# Altium PCB 100862.pcbdoc (part 3 of 3)
Units mm, origin at the board's own origin, x right, y up, seen from the top; angles counter-clockwise.
Board outline 48 x 50 mm, 4 copper layers (Top Layer, Internal Ground, Internal Power, Bottom Layer), stack 1.481 mm thick; 185 components, 111 nets, 536 pads, 346 vias.
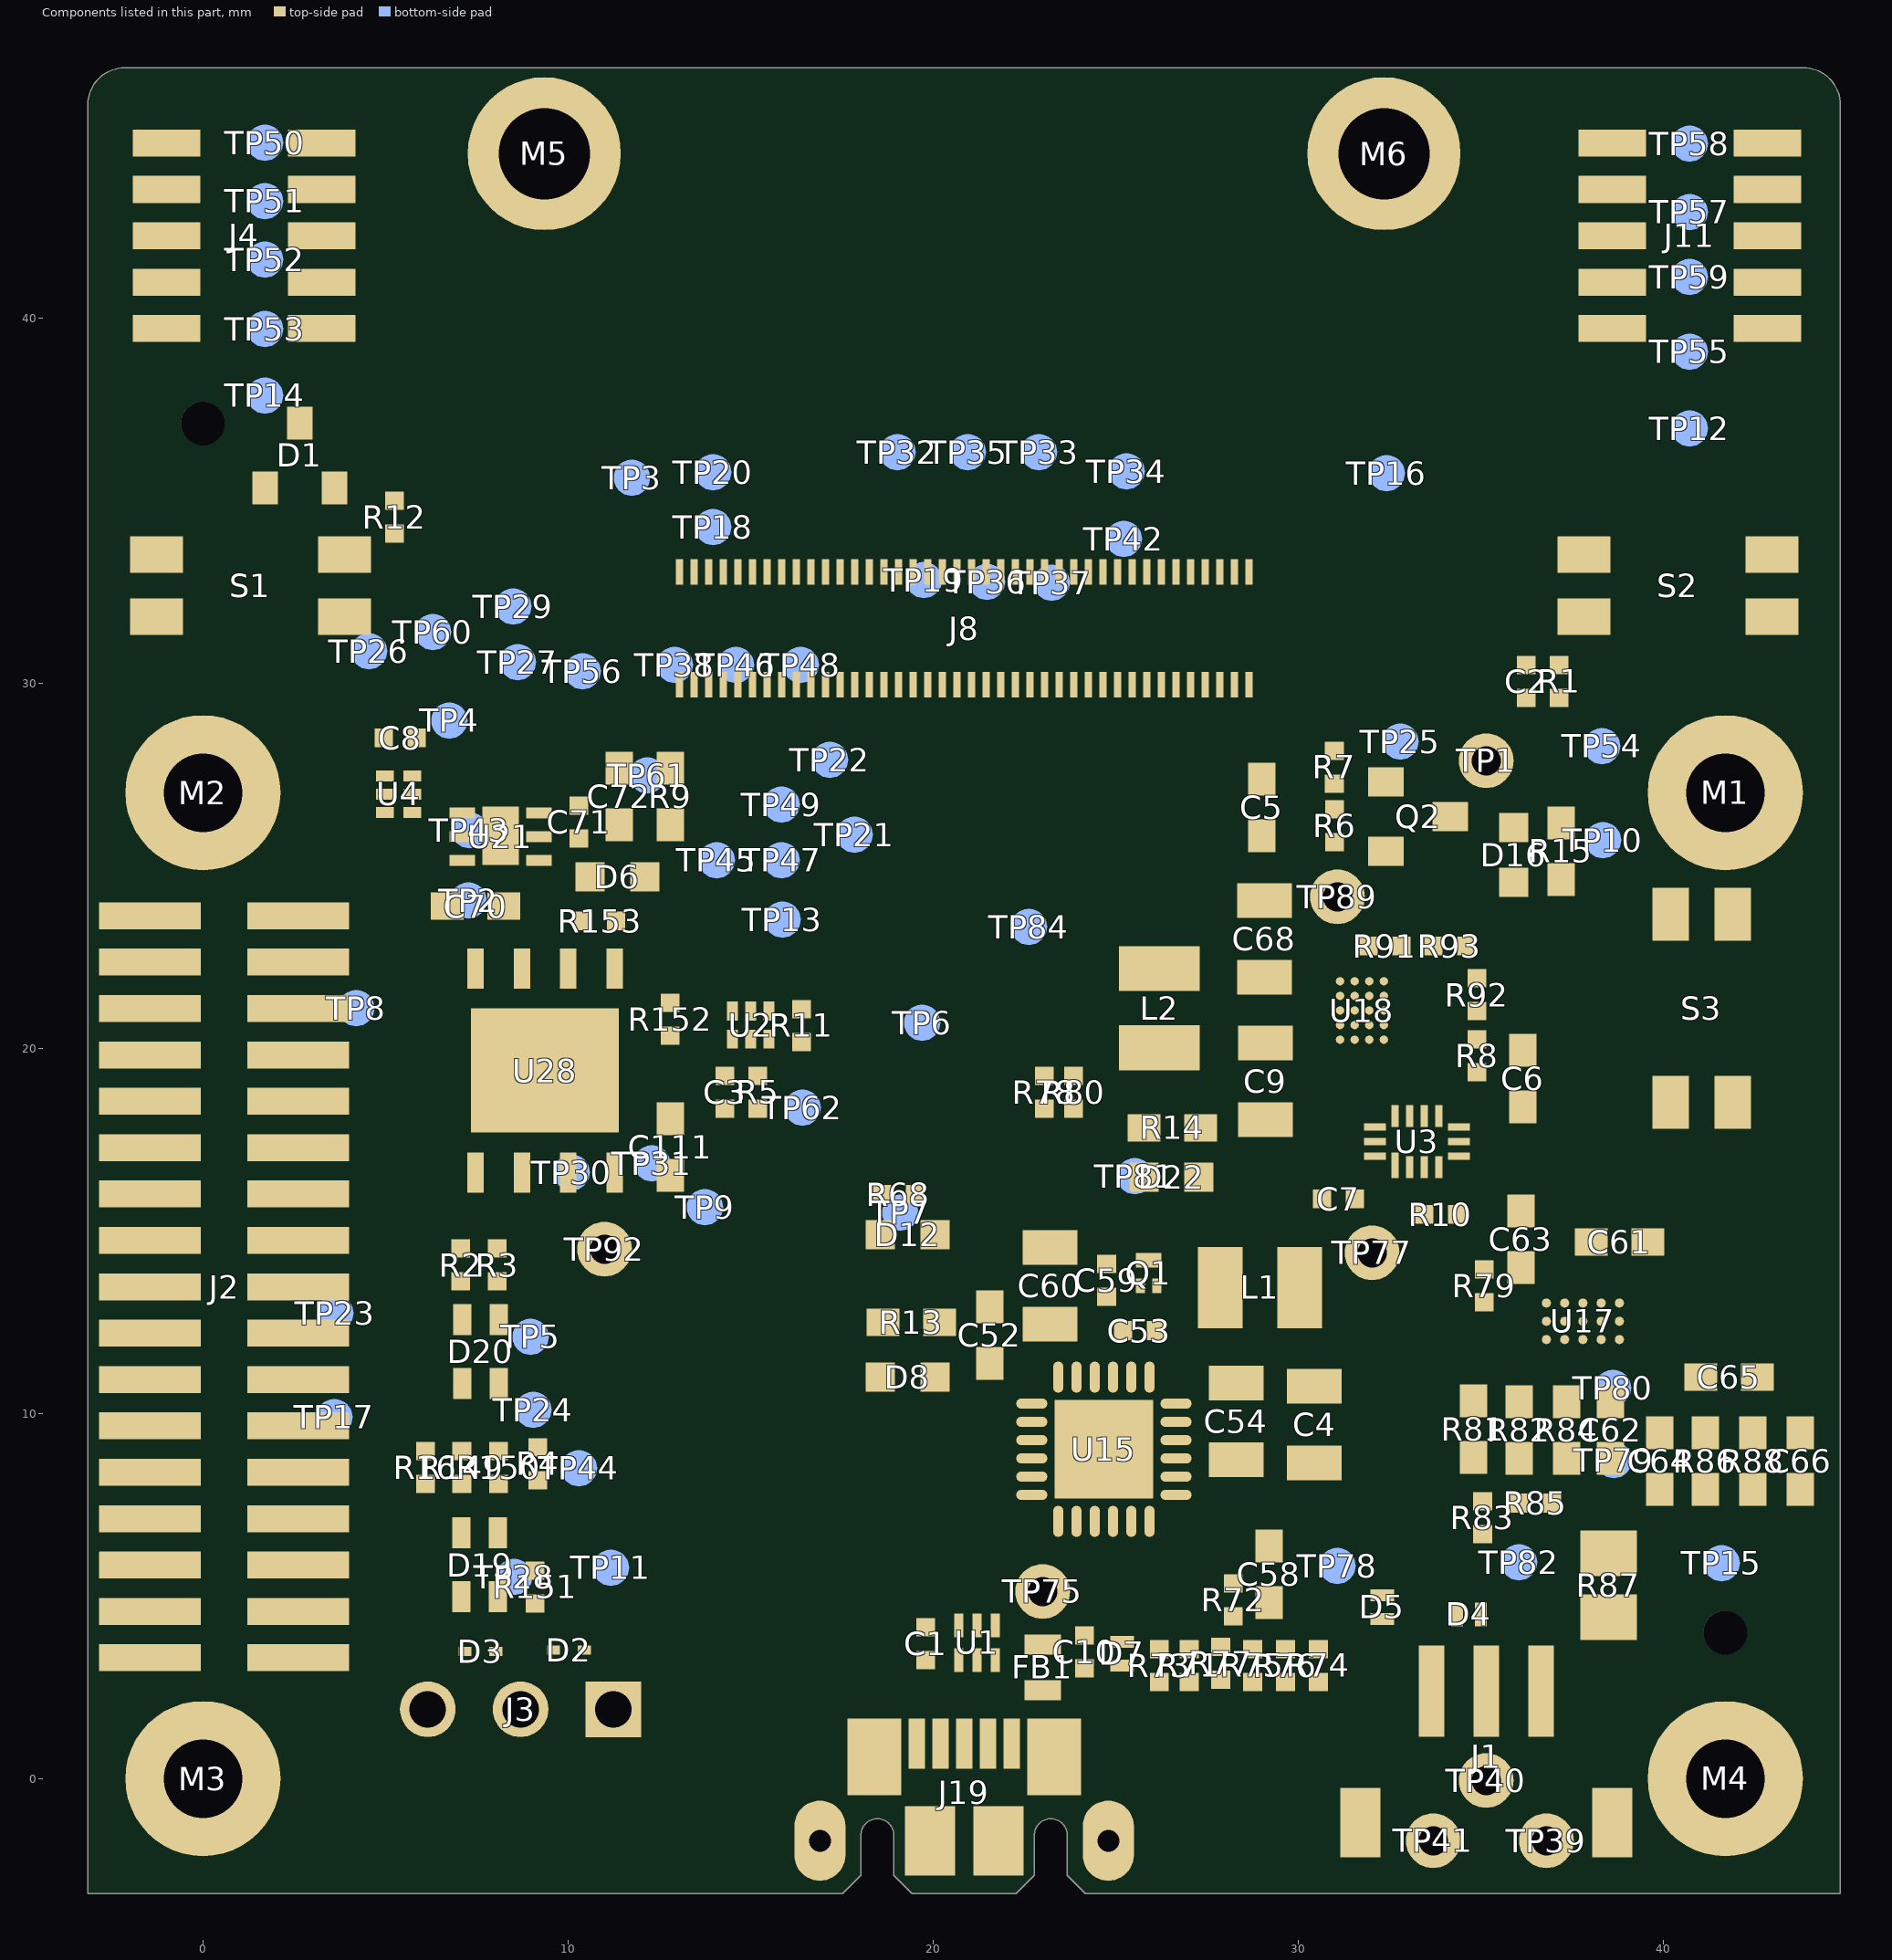
[diagram p5: the components of this part, seen from the top]

## Silkscreen, mask and mechanical layers (free items; w line width, h text height)
Top Overlay:
  rectangle: 11.15,4.1 15.15,8.1
  lines w0.1: 31.55,11.625 31.55,11.2 32.5,11.2 ; 32.975,10.75 32.975,11.2 ; 33.8,10.775 33.8,11.15 ; 33.85,11.2 34.3,11.2 ; 34.8,11 34.8,11.2 ; 36.1,11 36.1,11.2 ; 37.4,11 37.4,11.2 ; 38.6,11 38.6,11.2 36.1,11.2 ; 32.5,11.2 32.5,11.6 32.5,11.2 ; 32.5,11.2 34.3,11.2 ; 34.3,11.2 34.8,11.2 ; 34.8,11.2 36.1,11.2 ; 12.875,30.725 28.725,30.725 28.725,32.225 12.875,32.225 12.875,30.725
  lines w0.127: 26.554,12.648 26.754,12.848 26.754,14.648 26.954,14.848
  text "RADIO DBG" at 4.7,45.2 h0.7 r270
  text "MCU DBG" at 38.4,37.1 h0.7
  text "RESET" at -0.3,29.7 h0.7
  text "ISP" at 39.8,29.7 h0.7
  text "3V6" at 36.225,27.525 h0.7
  text "FPGA" at 14.4,24.5 h0.6
  text "POWER" at 38.125,22.6 h0.7 r270
  text "CHG" at 28.075,16.125 h0.6
  text "STAT" at 17.925,13.5 h0.7
  text "RADIO" at 5.85,13.475 h0.7 r270
  text "3V3_APP" at 9.125,12.025 h0.6
  text "REV" at 14.2,10.4 h0.8 r270
  text "VBUS" at 17.975,9.65 h0.7
  text "APPLICATION" at 16.9,9.275 h0.8 r270
  text "'.Board_Number'" at 18.275,9.275 h0.8 r270
  text "BOARD" at 15.55,7.925 h0.8 r270
  text "MCU" at 5.675,6.575 h0.7 r270
  text "EVM" at 18.225,4.65 h0.8 r270
  text "TEMP" at 36.175,4.113 h0.7 r90
  text "-" at 39.35,-2.85 h0.7
  text "+" at 30.275,-2.95 h0.7
  text ".Layer_Name" at -25.005,-126.749 h3.5
Bottom Overlay:
  text "TEMP" at 35.95,3.4 h0.6 r90
  text "-" at 38.4,-2.075 h0.7 r90
  text "+" at 32.025,-2.125 h0.7
  text ".Layer_Name" at -29.605,-126.749 h3.5
Top Paste:
  text ".Layer_Name" at -25.348,-126.08 h3.5
Bottom Paste:
  text ".Layer_Name" at -29.838,-126.663 h3.5
Top Solder:
  text ".Layer_Name" at -26.022,-126.08 h3.5
Bottom Solder:
  text ".Layer_Name" at -30.513,-126.663 h3.5
Drill Guide:
  text ".Layer_Name" at -24.798,-126.747 h3.5
Outline:
  lines w0.013: -3.15,-3.15 17.525,-3.15 18.025,-2.65 18.025,-1.55 cw(c18.475,-1.55) 18.925,-1.55 18.925,-2.65 19.425,-3.15 22.275,-3.15 22.775,-2.65 22.775,-1.55 cw(c23.225,-1.55) 23.675,-1.55 23.675,-2.65 24.175,-3.15 44.85,-3.15 44.85,45.85 ccw(c43.85,45.85) 43.85,46.85 -2.15,46.85 ccw(c-2.15,45.85) -3.15,45.85 -3.15,-3.15 ; 16.6,-2.05 ccw(c16.9,-2.05) 17.2,-2.05 17.2,-1.35 ccw(c16.9,-1.35) 16.6,-1.35 16.6,-2.05 ; 24.5,-2.05 ccw(c24.8,-2.05) 25.1,-2.05 25.1,-1.35 ccw(c24.8,-1.35) 24.5,-1.35 24.5,-2.05
FAB_DWG:
  drawing of 259 lines, arcs and shapes, not listed
  text "1" at 340.127,323.546 h7.62
  text "6" at -211.205,323.368 h7.62
  text "5" at -100.613,323.292 h7.62
  text "7" at -321.136,323.241 h7.62
  text "4" at 8.988,323.14 h7.62
  text "3" at 119.757,323.14 h7.62
  text "2" at 229.79,323.14 h7.62
  text "REVISIONS" at 294.147,314.558 h2.54
  text "NOTES: UNLESS OTHERWISE SPECIFIED" at -362.313,308.096 h2.03
  text "REV" at 211.855,307.558 h2.03
  text "DESCRIPTION" at 266.359,307.558 h2.03
  text "DATE" at 358.043,307.558 h2.03
  text "APRVD" at 383.231,307.558 h2.03
  text "1   DIMENSIONS AND VALUES ARE METRIC." at -362.313,300.096 h2.03
  text "01" at 212.259,299.558 h2.54
  text "INITIAL RELEASE" at 223.291,299.558 h2.54
  text "07/19/2016" at 352.131,299.558 h2.54
  text "REF" at -159.555,296.932 h2.29
  text "TRACE" at -108.387,296.932 h2.29
  text "LAYER" at -200.387,294.932 h2.29
  text "IMPEDANCE" at -182.051,294.932 h2.29
  text "TYPE" at -134.471,294.932 h2.29
  text "2   FABRICATION OF PRINTED CIRCUIT BOARD SHALL BE IN ACCORDANCE WITH" at -362.313,294.096 h2.03
  text "LYR" at -159.555,292.932 h2.29
  text "WIDTH" at -108.387,292.932 h2.29
  text "02" at 211.634,292.558 h2.54
  text "TVS DIODE AND PULL-UP CHANGES" at 222.666,292.558 h2.54
  text "08/12/2016" at 351.506,292.558 h2.54
  text "IPC-6011 AND IPC-6012, CLASS 2, AND THE DESIGN INTENT OF IPC-2221 AND" at -362.313,290.096 h2.03
  text "LAYER 1" at -202.419,286.932 h2.29
  text "90 OHM" at -182.007,286.932 h2.29
  text "DIFF PAIR" at -150.007,286.932 h2.29
  text "0.213" at -108.587,286.932 h2.29
  text "2" at -158.075,286.78 h2.29
  text "IPC-2222,CLASS 2, AND SHALL MEET THE ACCEPTABILITY REQUIREMENTS OF" at -362.313,286.096 h2.03
  text "03" at 211.634,286.083 h2.54
  text "DESIGN VALIDATION" at 222.666,286.083 h2.54
  text "09/27/2016" at 351.506,286.083 h2.54
  text "IPC-A-600. PRODUCE PCB USING GERBER OR ODB++ FILES PROVIDED." at -362.313,282.096 h2.03
  text "3   FABRICATION VENDOR MUST BE UL APPROVED AND BOARD SHALL BE MARKED WITH" at -362.313,276.096 h2.03
  text "A UL REGISTERED LOGO. MATERIAL MUST MEET UL 94V-0 FLAMMABILITY RATING." at -362.313,272.096 h2.03
  text "4   MATERIAL REQUIREMENTS: MANUFACTURER SHALL SELECT MATERIALS TO ACHIEVE A" at -362.313,266.096 h2.03
  text "IMPEDANCE CONTROL CHART" at -197.543,265.932 h5.08
  text "BALANCED CONSTRUCTION WITH THE OPTION OF MODIFYING DIELECTRIC THICKNESS" at -362.313,262.096 h2.03
  text "TO MEET THE REQUIREMENTS SPECIFIED HEREIN." at -362.313,258.096 h2.03
  text "15" at -153.431,256.932 h2.03
  text "D" at 401.976,253.874 h7.62
  text "D" at -382.706,253.722 h7.62
  text "5  BASE MATERIALS: GLASS EPOXY FR4 OR EQUIVALENT PER IPC-4101 MEETING RoHS" at -362.313,252.096 h2.03
  text "REQUIREMENTS FOR PCB FABRICATION AND ASSEMBLY, NOT LESS THAN TG150," at -362.313,248.096 h2.03
  text "A  SEE LAYER DETAIL FOR LAYER STACK UP, ESTIMATED DIELECTRIC THICKNESS," at -362.313,244.096 h2.03
  text "AND COPPER WEIGHT." at -362.313,240.096 h2.03
  text "B  MANUFACTURER SHALL SUBMIT A PROPOSED STACK UP FOR SYNAPSE APPROVAL" at -362.313,236.096 h2.03
  text "IF MODIFICATION IS REQUIRED." at -362.313,232.096 h2.03
  text "C  NO MATERIAL SUBSTITUTIONS WILL BE ALLOWED WITHOUT SYNAPSE APPROVAL." at -362.313,228.096 h2.03
  text "6   PROCESSING ALLOWANCE:" at -362.313,222.096 h2.03
  text "A  LAYER REGISTRATION FROM PRIMARY SIDE TO SECONDARY SIDE SHALL NOT" at -362.313,218.096 h2.03
  text "EXCEED 0.13mm TOTAL." at -362.313,214.096 h2.03
  text "B  MAXIMUM BOW AND TWIST SHALL BE .75% PER IPC-TM-650." at -362.313,210.096 h2.03
  text "7   VIAS" at -362.313,204.096 h2.03
  text "A  VIAS WITH A FINISHED HOLE SIZE OF 0.25mm OR SMALLER DO NOT REQUIRE" at -362.313,200.096 h2.03
  text "A MINIMUM HOLE SIZE AND MAY BE PLATED SHUT OR FILLED WITH SOLDER" at -362.313,196.096 h2.03
  text "MASK. MINIMUM SOLDER PLATING MUST BE MAINTAINED." at -362.313,192.096 h2.03
  text "B  ALL LASER VIA IN PADS TO BE COPLANAR IF PRESENT IN DESIGN." at -362.313,188.096 h2.03
  text "8   CONDUCTORS:  COPPER FOIL SHALL BE IN ACCORDANCE WITH IPC-4562/0." at -362.313,182.096 h2.03
  text "A  FINISH. COPPER PLATE THICKNESS ON SURFACE COPPER AND PLATED" at -362.313,178.096 h2.03
  text "THROUGH HOLES TO BE 0.025mm MINIMUM." at -362.313,174.096 h2.03
  text "B  MINIMUM FINISH CONDUCTOR WIDTH IS 0.076mm" at -362.313,170.096 h2.03
  text "C  MINIMUM FINISHED CONDUCTOR SPACING (AIR GAP) INCLUDING PADS, VIAS," at -362.313,166.096 h2.03
  text "SHAPES, ETC. IS 0.076mm." at -362.313,162.096 h2.03
  text "9   FINAL FINISH SHALL BE ELECTROLESS NICKEL / IMMERSION GOLD (ENIG)." at -362.313,156.096 h2.03
  text "FINISH THICKNESS SHALL BE 3 TO 6 um [118 TO 236 MICROINCHES] OF NICKEL" at -362.313,152.096 h2.03
  text "AND 0.04 TO 0.125um [1.5 TO 5 MICROINCHES] OF GOLD." at -362.313,148.096 h2.03
  text "FINISH SHALL BE RoHS COMPLIANT AND MEET REQUIREMENTS OF IPC-4552." at -362.313,144.096 h2.03
  text "10  FILLETING IS NOT PERMITTED WITHOUT PRIOR SYNAPSE APPROVAL." at -362.313,138.096 h2.03
  text "11  SOLDER MASK AND COATING:  APPLY SOLDER MASK TO PRIMARY AND SECONDARY" at -362.313,132.096 h2.03
  text "C" at 401.976,128.423 h7.62
  text "C" at -382.833,128.22 h7.62
  text "SIDES OF PRINTED WIRING BOARD USING SUPPLIED GERBER FILES IN ACCORDANCE" at -362.313,128.096 h2.03
  text "WITH IPC-SM-840, THICKNESS BETWEEN 0.02 - 0.04mm, COLOR GREEN LIQUID" at -362.313,124.096 h2.03
  text "PHOTO-IMAGEABLE, CLASS 2." at -362.313,120.096 h2.03
  text "12  OVERALL BOARD THICKNESS SHALL BE MEASURED OVER FINAL FINISH INCLUDING" at -362.313,114.096 h2.03
  text "SOLDER MASK." at -362.313,110.096 h2.03
  text "13  SILKSCREEN:  APPLY SILKSCREEN (LEGEND) TO PRIMARY AND SECONDARY SIDES" at -362.313,104.096 h2.03
  text "OF PRINTED CIRCUIT BOARD. USE PERMANENT INK, NON-NUTRIENT, NON-" at -362.313,100.096 h2.03
  text "CONDUCTIVE POLYMER, COLOR WHITE, PER IPC-4781, TYPE 2. RELIEVE LEGEND" at -362.313,96.096 h2.03
  text "FROM ALL EXPOSED LANDS AND HOLES AS REQUIRED." at -362.313,92.096 h2.03
  text "14  ANY ALTERATIONS TO THE PROVIDED GERBER ARTWORK FILES MUST BE SUBMITTED" at -362.313,86.096 h2.03
  text "TO SYNAPSE FOR APPROVAL." at -362.313,82.096 h2.03
  text "15  IMPEDANCE REQUIREMENTS: LAYERS AND SIGNALS WITH CONTROLLED IMPEDANCES" at -362.313,76.096 h2.03
  text "ARE DETAILED IN THE CONTROLLED IMPEDANCE CHART. MANUFACTURER HAS THE" at -362.313,72.096 h2.03
  text "OPTION OF ADJUSTING THE DIELECTRIC THICKNESS AND TRACE WIDTHS AS" at -354.563,67.846 h2.03
  text "REQUIRED TO MEET THE SPECIFICATIONS CONTAINED IN THIS DRAWING." at -354.563,63.846 h2.03
  text "A  IMPEDANCE TOLERANCES ARE +/-10%." at -362.063,58.846 h2.03
  text "B  ANY ADJUSTMENTS TO DIELECTRIC THICKNESS OR TRACE WIDTHS MUST BE" at -362.063,54.096 h2.03
  text "APPROVED BY SYNAPSE." at -362.313,50.346 h2.03
  text "C  IMPEDANCE TEST RESULTS AND TEST COUPONS FROM EACH LOT SHALL BE" at -366.063,45.846 h2.03
  text "PROVIDED TO SYNAPSE." at -366.063,42.096 h2.03
  text "16  MARK MANUFACTURER NAME, INITIALS, OR LOGO, LOT NUMBER, DATE CODE," at -362.313,36.596 h2.03
  text "UL RECOGNITION MARK AND FLAME RATING IN ETCH OR SILKSCREEN." at -362.313,32.596 h2.03
  text "17  PANELIZATION: COORDINATE WITH SYNAPSE OR THE SYNAPSE SPECIFIED" at -362.313,26.846 h2.03
  text "ASSEMBLY VENDOR FOR PANEL SIZE AND CONFIGURATION. IF BOARDS ARE" at -362.313,22.846 h2.03
  text "NOT TO BE COMPLETELY ROUTED OUT, TRIM PANELIZATION TABS TO LESS" at -362.313,18.846 h2.03
  text "THAN 0.1mm UPON DE-PANELIZATION. AVOID PANELIZATION TABS IN AREAS" at -362.313,14.846 h2.03
  text "INDICATED ON THIS DRAWING." at -362.313,10.846 h2.03
  text "18  BOARD MUST BE ELECTRICALLY TESTED USING SUPPLIED IPC-356 NETLIST." at -361.813,5.846 h2.03
  text "B" at -382.604,2.82 h7.62
  text "B" at 405.053,0.524 h7.62
  text "PRIMARY SIDE" at -285.239,-10.029 h2.03
  text "SILKSCREEN" at -255.995,-15.029 h2.03
  text "SOLDERMASK" at -255.995,-20.529 h2.03
  text "1/4 OZ CU" at -309.63,-27.449 h2.03
  text "LAYER 1 (SIGNAL)" at -255.995,-27.529 h2.03
  text "DIELECTRIC" at -311.235,-33.029 h2.03
  text "1.50 +/-0.15" at -356.239,-39.529 h2.03
  text "1/2 OZ CU" at -309.73,-40.649 h2.03
  text "LAYER 2 (GROUND)" at -255.995,-41.029 h2.03
  text "FINISHED" at -352.991,-44.529 h2.03
  text "DIELECTRIC" at -311.235,-45.029 h2.03
  text "THICKNESS" at -354.303,-49.529 h2.03
  text "LAYER 3 (POWER)" at -255.995,-49.529 h2.03
  text "1/2 OZ CU" at -309.73,-49.649 h2.03
  text "DIELECTRIC" at -311.235,-57.529 h2.03
  text "1/4 OZ CU" at -309.63,-62.749 h2.03
  text "LAYER 4 (SIGNAL)" at -255.995,-63.029 h2.03
  text "SOLDERMASK" at -255.995,-70.029 h2.03
  text "SILKSCREEN" at -255.995,-76.029 h2.03
  text "SECONDARY SIDE" at -286.863,-80.529 h2.03
  text "DIMENSIONS ARE FOR REFERENCE ONLY," at -21.109,-85.472 h2.29
  text "USE BOARD OUTLINE FOR DIMENSIONAL DATA." at -27.169,-90.062 h2.29
  text "LAYER DETAIL" at -299.879,-93.524 h5.08
  text "SCALE:NONE" at -285.115,-100.529 h2.03
  text "CAP CONSTRUCTION SHOWN (PREFERRED)" at -302.828,-107.674 h2.03
  text "CORE CONSTRUCTION ACCEPTABLE" at -297.956,-112.479 h2.03
  text "A" at 401.849,-122.935 h7.62
  text "A" at -382.858,-123.062 h7.62
  text "APPROVALS" at 193.983,-126.442 h2.03
  text "DATE" at 237.043,-126.442 h2.03
  text "UNLESS OTHERWISE" at 138.035,-128.442 h2.54
  text "DESIGNER" at 177.291,-132.442 h2.03
  text "SPECIFIED" at 145.147,-133.442 h2.54
  text "DIMENSIONS ARE" at 140.067,-138.442 h2.54
  text "F. PRICE" at 181.291,-138.442 h2.54
  text "09/27/2016" at 231.131,-138.442 h2.54
  text "1511 Sixth Ave. Suite 300, Seattle, WA 98101 206.381.0898" at 268.379,-139.442 h2.54
  text "IN MILLIMETERS" at 140.067,-143.442 h2.54
  text "ENGINEER" at 177.291,-145.442 h2.03
  text "PRINTED CIRCUIT BOARD" at 294.787,-147.942 h3.81
  text "PROPRIETARY" at 89.527,-148.442 h3.81
  text "D. BRUEY /  M. CIUFFO" at 181.291,-151.442 h2.54
  text "TOLERANCES:" at 144.115,-153.442 h2.54
  text "AND" at 101.719,-154.442 h3.81
  text ".Board_Name" at 287.35,-155.925 h5.08
  text "MECH ENG" at 177.291,-158.442 h2.03
  text ".XX" at 142.795,-160.442 h2.29
  text "0.25" at 156.291,-160.442 h2.29
  text "CONFIDENTIAL" at 88.003,-160.942 h3.81
  text "SIZE" at 260.443,-162.442 h1.78
  text "DWG NO" at 271.291,-162.442 h1.78
  text "REV" at 379.155,-162.442 h1.78
  text "N/A" at 181.291,-164.442 h2.54
  text "THE INFORMATION CONTAINED IN" at 90.017,-165.192 h1.52
  text ".XXX" at 140.963,-167.442 h2.29
  text "0.127" at 156.291,-167.442 h2.29
  text "THIS DRAWING IS PROPRIETARY AND" at 88.193,-167.942 h1.52
  text "RESTRICTED. ANY REPRODUCTION" at 90.017,-170.692 h1.52
  text "601-" at 288.346,-172.143 h7.62
  text ".Board_Number" at 316.746,-172.243 h7.62
  text "D" at 260.243,-172.442 h7.62
  text ".PCB_Revision" at 374.687,-172.95 h7.62
  text "IN PART OR WHOLE WITHOUT THE" at 90.017,-173.442 h1.52
  text "ANGLES" at 143.299,-174.442 h2.29
  text "5" at 162.291,-174.442 h2.29
  text "EXPRESS WRITTEN PERMISSION" at 90.983,-176.192 h1.52
  text "OF THE OWNER IS PROHIBITED" at 90.983,-178.942 h1.52
  text "SCALE:NONE" at 261.171,-179.442 h1.78
  text "SHEET 1 OF 1" at 372.747,-179.442 h1.78
  text "1" at 340.331,-191.49 h7.62
  text "6" at -211.129,-191.642 h7.62
  text "5" at -100.69,-191.642 h7.62
  text "4" at 8.759,-191.921 h7.62
  text "3" at 119.579,-191.947 h7.62
  text "2" at 230.018,-191.947 h7.62
  text "7" at -321.238,-192.506 h7.62
ASY_DWG:
  circle w0.38: c166.034,-171.894 r0.829
  lines w0.3: 176.291,-181.442 176.291,-121.442 ; 176.291,-167.442 256.291,-167.442 ; 176.291,-154.442 256.291,-154.442 ; 176.291,-141.442 256.291,-141.442 397.291,-141.442 ; 176.291,-128.442 256.291,-128.442 ; 207.291,290.558 397.291,290.558 ; 207.616,297.65 207.291,297.558 397.291,297.558 ; 207.616,312.65 207.291,312.558 397.291,312.558 ; 221.291,283.558 221.291,312.558 ; 226.291,-181.442 226.291,-121.442 ; 256.291,-181.442 256.291,-121.442 ; 256.291,-175.442 397.291,-175.442 ; 256.291,-159.442 396.291,-159.442 ; 269.291,-175.442 269.291,-159.442 ; 346.291,283.558 346.291,312.558 ; 365.291,-175.442 365.291,-159.442 ; 377.291,283.558 377.291,312.558
  lines w0.38: 151.291,-167.442 153.291,-167.442 ; 151.291,-165.442 153.291,-165.442 ; 151.291,-160.442 153.291,-160.442 ; 151.291,-158.442 153.291,-158.442 ; 152.291,-166.442 152.291,-164.442 ; 152.291,-159.442 152.291,-157.442 ; 157.291,-174.442 159.291,-174.442 ; 157.291,-172.442 159.291,-172.442 ; 158.291,-173.442 158.291,-171.442
  lines w0.508: 177.313,319.762 177.313,332.716 ; 177.313,319.762 177.313,332.716 ; 177.313,319.762 177.313,332.716 ; -393.298,-56.793 -373.994,-56.793 -393.298,-56.793 ; -393.298,-56.336 -373.994,-56.336 -393.298,-56.336 ; -393.298,68.606 -373.994,68.606 -393.298,68.606 ; -393.298,69.064 -373.994,69.064 -393.298,69.064 ; -393.298,194.006 -373.994,194.006 -393.298,194.006 ; -393.298,194.463 -373.994,194.463 -393.298,194.463 ; -264.062,-194.893 -264.062,-181.939 -264.062,-194.893 ; -264.062,319.762 -264.062,332.716 -264.062,319.762 ; -263.605,-194.893 -263.605,-181.939 -263.605,-194.893 ; -263.605,319.762 -263.605,332.716 -263.605,319.762 ; -153.852,-194.893 -153.852,-181.939 -153.852,-194.893 ; -153.852,319.762 -153.852,332.716 -153.852,319.762 ; -153.395,-194.893 -153.395,-181.939 -153.395,-194.893 ; -153.395,319.762 -153.395,332.716 -153.395,319.762 ; -43.616,-194.893 -43.616,-181.939 -43.616,-194.893 ; -43.616,319.762 -43.616,332.716 -43.616,319.762 ; -43.159,-194.893 -43.159,-181.939 -43.159,-194.893 ; -43.159,319.762 -43.159,332.716 -43.159,319.762 ; 66.646,319.762 66.646,332.716 66.646,319.762 ; 67.103,319.762 67.103,332.716 67.103,319.762 ; 176.856,319.762 176.856,332.716 176.856,319.762 ; 287.067,320.016 287.067,332.716 287.067,320.016 ; 287.092,-194.893 287.092,-181.939 287.092,-194.893 ; 287.524,319.762 287.524,332.716 287.524,319.762 ; 287.549,-194.893 287.549,-181.939 287.549,-194.893 ; 397.531,-56.793 416.835,-56.793 397.531,-56.793 ; 397.531,-56.336 416.835,-56.336 397.531,-56.336 ; 397.531,68.632 416.835,68.632 397.531,68.632 ; 397.531,69.089 416.835,69.089 397.531,69.089 ; 397.531,194.057 416.835,194.057 397.531,194.057 ; 397.531,194.514 416.835,194.514 397.531,194.514
  lines w1: -373.709,-181.442 397.291,-181.442 397.291,319.558 -373.709,319.558 -373.709,-181.442
  lines w1.1: 67.291,-194.442 67.291,-181.442 ; 81.291,-181.442 81.291,-141.442 132.291,-141.442 ; 132.291,-181.442 132.291,-141.442 ; 176.291,-194.442 176.291,-181.442 ; 207.291,283.558 207.291,319.558 ; 207.291,304.558 397.291,304.558 ; 256.291,-121.442 132.291,-121.442 132.291,-141.442
  text "1" at 340.127,323.546 h7.62
  text "6" at -211.205,323.368 h7.62
  text "5" at -100.613,323.292 h7.62
  text "7" at -321.136,323.241 h7.62
  text "4" at 8.988,323.14 h7.62
  text "3" at 119.757,323.14 h7.62
  text "2" at 229.79,323.14 h7.62
  text "REVISIONS" at 294.147,314.558 h2.54
  text "REV" at 211.855,307.558 h2.03
  text "DESCRIPTION" at 266.359,307.558 h2.03
  text "DATE" at 358.043,307.558 h2.03
  text "APRVD" at 383.231,307.558 h2.03
  text "NOTES: UNLESS OTHERWISE SPECIFIED" at -361.584,307.458 h2.03
  text "1   RoHS COMPLIANT ASSEMBLY REQUIRED. ASSEMBLE PER IPC-A-610, CLASS 2," at -361.484,300.958 h2.03
  text "01" at 212.259,299.558 h2.54
  text "INITIAL RELEASE" at 223.291,299.558 h2.54
  text "07/19/2016" at 352.131,299.558 h2.54
  text "2   AQUEOUS BASED CLEANING AFTER SOLDER FOR ALL COMPONENTS IS PREFERRED, NO-CLEAN" at -361.39,295.753 h2.03
  text "02" at 211.634,292.558 h2.54
  text "TVS DIODE AND PULL-UP CHANGES" at 222.666,292.558 h2.54
  text "08/12/2016" at 351.506,292.558 h2.54
  text "RoHS SOLDER PROCESS IS ACCEPTABLE." at -361.534,291.608 h2.03
  text "03" at 211.634,286.083 h2.54
  text "DESIGN VALIDATION" at 222.666,286.083 h2.54
  text "09/27/2016" at 351.506,286.083 h2.54
  text "3   ITEM IDENTIFICATION: MARK REVISION NUMBER OF THIS DRAWING IN THE SPACE PROVIDED." at -361.709,285.808 h2.03
  text "4   PCBAS  ARE TO BE SERIALIZED." at -361.7,280.7 h2.03
  text "5   REMOVE KAPTON FROM PARTS M5, M6, and J8." at -361.55,276.05 h2.03
  text "D" at 401.976,253.874 h7.62
  text "D" at -382.706,253.722 h7.62
  text "C" at 401.976,128.423 h7.62
  text "C" at -382.833,128.22 h7.62
  text "B" at -382.604,2.82 h7.62
  text "B" at 405.053,0.524 h7.62
  text "ASSEMBLY TOP" at -10.025,-81.417 h3.81
  text "A" at 401.849,-122.935 h7.62
  text "A" at -382.858,-123.062 h7.62
  text "APPROVALS" at 193.983,-126.442 h2.03
  text "DATE" at 237.043,-126.442 h2.03
  text "UNLESS OTHERWISE" at 138.035,-128.442 h2.54
  text "DESIGNER" at 177.291,-132.442 h2.03
  text "SPECIFIED" at 145.147,-133.442 h2.54
  text "DIMENSIONS ARE" at 140.067,-138.442 h2.54
  text "F. PRICE" at 181.291,-138.442 h2.54
  text "09/27/2016" at 231.131,-138.442 h2.54
  text "1511 Sixth Ave. Suite 300, Seattle, WA 98101 206.381.0898" at 268.379,-139.442 h2.54
  text "IN MILLIMETERS" at 140.067,-143.442 h2.54
  text "ENGINEER" at 177.291,-145.442 h2.03
  text "PRINTED CIRCUIT BOARD ASSEMBLY" at 281.071,-147.942 h3.81
  text "PROPRIETARY" at 89.527,-148.442 h3.81
  text "D. BRUEY /  M. CIUFFO" at 181.291,-151.442 h2.54
  text "TOLERANCES:" at 144.115,-153.442 h2.54
  text "AND" at 101.719,-154.442 h3.81
  text ".Board_Name" at 287.35,-155.925 h5.08
  text "MECH ENG" at 177.291,-158.442 h2.03
  text ".XX" at 142.795,-160.442 h2.29
  text "0.25" at 156.291,-160.442 h2.29
  text "CONFIDENTIAL" at 88.003,-160.942 h3.81
  text "SIZE" at 260.443,-162.442 h1.78
  text "DWG NO" at 271.291,-162.442 h1.78
  text "REV" at 379.155,-162.442 h1.78
  text "N/A" at 181.291,-164.442 h2.54
  text "THE INFORMATION CONTAINED IN" at 90.017,-165.192 h1.52
  text ".XXX" at 140.963,-167.442 h2.29
  text "0.127" at 156.291,-167.442 h2.29
  text "THIS DRAWING IS PROPRIETARY AND" at 88.193,-167.942 h1.52
  text "RESTRICTED. ANY REPRODUCTION" at 90.017,-170.692 h1.52
  text "600-" at 287.046,-172.143 h7.62
  text ".Board_Number" at 316.746,-172.243 h7.62
  text "D" at 260.243,-172.442 h7.62
  text ".PCB_Revision" at 374.687,-172.95 h7.62
  text "IN PART OR WHOLE WITHOUT THE" at 90.017,-173.442 h1.52
  text "ANGLES" at 143.299,-174.442 h2.29
  text "5" at 162.291,-174.442 h2.29
  text "EXPRESS WRITTEN PERMISSION" at 90.983,-176.192 h1.52
  text "OF THE OWNER IS PROHIBITED" at 90.983,-178.942 h1.52
  text "SCALE:4:1" at 261.883,-179.442 h1.78
  text "SHEET 1 OF 2" at 372.747,-179.442 h1.78
  text "1" at 340.331,-191.49 h7.62
  text "6" at -211.129,-191.642 h7.62
  text "5" at -100.69,-191.642 h7.62
  text "4" at 8.759,-191.921 h7.62
  text "3" at 119.579,-191.947 h7.62
  text "2" at 230.018,-191.947 h7.62
  text "7" at -321.238,-192.506 h7.62
ASY_DWG_R:
  lines w0.3: -373.709,-175.442 -232.709,-175.442 ; -373.709,-141.442 -232.709,-141.442 ; -372.709,-159.442 -232.709,-159.442 ; -341.709,-175.442 -341.709,-159.442 ; -245.709,-175.442 -245.709,-159.442 ; -232.709,-181.442 -232.709,-121.442
  lines w0.508: -153.731,319.762 -153.731,332.716 ; -153.731,319.762 -153.731,332.716 ; -153.731,319.762 -153.731,332.716 ; -393.253,-56.793 -373.949,-56.793 -393.253,-56.793 ; -393.253,-56.336 -373.949,-56.336 -393.253,-56.336 ; -393.253,68.632 -373.949,68.632 -393.253,68.632 ; -393.253,69.089 -373.949,69.089 -393.253,69.089 ; -393.253,194.057 -373.949,194.057 -393.253,194.057 ; -393.253,194.514 -373.949,194.514 -393.253,194.514 ; -263.967,-194.893 -263.967,-181.939 -263.967,-194.893 ; -263.942,319.762 -263.942,332.716 -263.942,319.762 ; -263.51,-194.893 -263.51,-181.939 -263.51,-194.893 ; -263.485,320.016 -263.485,332.716 -263.485,320.016 ; -153.274,319.762 -153.274,332.716 -153.274,319.762 ; -43.521,319.762 -43.521,332.716 -43.521,319.762 ; -43.064,319.762 -43.064,332.716 -43.064,319.762 ; 66.741,-194.893 66.741,-181.939 66.741,-194.893 ; 66.741,319.762 66.741,332.716 66.741,319.762 ; 67.198,-194.893 67.198,-181.939 67.198,-194.893 ; 67.198,319.762 67.198,332.716 67.198,319.762 ; 176.977,-194.893 176.977,-181.939 176.977,-194.893 ; 176.977,319.762 176.977,332.716 176.977,319.762 ; 177.434,-194.893 177.434,-181.939 177.434,-194.893 ; 177.434,319.762 177.434,332.716 177.434,319.762 ; 287.187,-194.893 287.187,-181.939 287.187,-194.893 ; 287.187,319.762 287.187,332.716 287.187,319.762 ; 287.644,-194.893 287.644,-181.939 287.644,-194.893 ; 287.644,319.762 287.644,332.716 287.644,319.762 ; 397.576,-56.793 416.88,-56.793 397.576,-56.793 ; 397.576,-56.336 416.88,-56.336 397.576,-56.336 ; 397.576,68.606 416.88,68.606 397.576,68.606 ; 397.576,69.064 416.88,69.064 397.576,69.064 ; 397.576,194.006 416.88,194.006 397.576,194.006 ; 397.576,194.463 416.88,194.463 397.576,194.463
  lines w1: -373.709,-181.442 397.291,-181.442 397.291,319.558 -373.709,319.558 -373.709,-181.442
  lines w1.1: -152.709,-194.442 -152.709,-181.442 ; -43.709,-194.442 -43.709,-181.442
  text "1" at -316.545,323.546 h7.62
  text "6" at 234.787,323.368 h7.62
  text "5" at 124.195,323.292 h7.62
  text "7" at 344.718,323.241 h7.62
  text "2" at -206.208,323.14 h7.62
  text "3" at -96.175,323.14 h7.62
  text "4" at 14.594,323.14 h7.62
  text "NOTES: UNLESS OTHERWISE SPECIFIED" at 385.166,307.458 h2.03
  text "1   RoHS COMPLIANT ASSEMBLY REQUIRED. ASSEMBLE PER IPC-A-610, CLASS 2," at 385.066,300.958 h2.03
  text "2   AQUEOUS BASED CLEANING AFTER SOLDER FOR ALL COMPONENTS IS PREFERRED, NO-CLEAN" at 384.972,295.753 h2.03
  text "RoHS SOLDER PROCESS IS ACCEPTABLE." at 385.116,291.608 h2.03
  text "3   ITEM IDENTIFICATION: MARK REVISION NUMBER OF THIS DRAWING IN THE SPACE PROVIDED." at 385.291,285.808 h2.03
  text "D" at -378.394,253.874 h7.62
  text "D" at 406.288,253.722 h7.62
  text "C" at -378.394,128.423 h7.62
  text "C" at 406.415,128.22 h7.62
  text "B" at -378.521,2.82 h7.62
  text "B" at 409.136,0.524 h7.62
  text "ASSEMBLY BOTTOM" at 34.975,-81.417 h3.81
  text "A" at -378.267,-122.935 h7.62
  text "A" at 406.44,-123.062 h7.62
  text "1511 Sixth Ave. Suite 300, Seattle, WA 98101 206.381.0898" at -244.797,-139.442 h2.54
  text "PRINTED CIRCUIT BOARD ASSEMBLY" at -257.489,-147.942 h3.81
  text ".Board_Name" at -283.252,-155.957 h5.08
  text "REV" at -355.573,-162.442 h1.78
  text "DWG NO" at -247.709,-162.442 h1.78
  text "SIZE" at -236.861,-162.442 h1.78
  text "600-" at -263.464,-172.143 h7.62
  text ".Board_Number" at -293.164,-172.243 h7.62
  text "D" at -236.661,-172.442 h7.62
  text ".PCB_Revision" at -351.998,-172.963 h7.62
  text "SHEET 2 OF 2" at -349.165,-179.442 h1.78
  text "SCALE:4:1" at -238.301,-179.442 h1.78
  text "1" at -316.749,-191.49 h7.62
  text "5" at 124.272,-191.642 h7.62
  text "6" at 234.711,-191.642 h7.62
  text "4" at 14.823,-191.921 h7.62
  text "2" at -206.436,-191.947 h7.62
  text "3" at -95.997,-191.947 h7.62
  text "7" at 344.82,-192.506 h7.62
TITLEBLOCK:
  lines w0.25: -51.609,-119.942 69.391,-119.942 ; 6.891,-100.942 69.391,-100.942 69.391,-129.442 -51.609,-129.442 -51.609,-107.442 69.391,-107.442 ; 24.891,-129.442 24.891,-100.942 ; 24.891,-112.442 69.391,-112.442 ; 58.391,-119.942 58.391,-112.442
  text "PRODUCT" at 11.135,-103.442 h1.52
  text "1511 SIXTH AVENUE, THIRD FLOOR" at 25.891,-103.442 h1.52
  text "DEVELOPMENT" at 9.203,-106.442 h1.52
  text "SEATTLE,WA 98101  206.381.0898" at 25.891,-106.442 h1.52
  text "DATE" at 25.891,-109.442 h1.02
  text "09/27/2016" at 38.771,-110.942 h2.03
  text "PRINTED CIRCUIT BOARD" at -32.845,-111.942 h2.29
  text "PART NUMBER" at 25.891,-114.442 h1.02
  text "REV" at 62.667,-114.442 h1.02
  text "601-" at 31.546,-118.143 h2.54
  text ".Board_Number" at 41.846,-118.143 h2.54
  text "'.Board_Name'" at -40.925,-118.175 h3.81
  text ".PCB_Revision" at 61.691,-118.61 h2.54
  text "PROPRIETARY AND CONFIDENTIAL" at 30.117,-122.942 h1.52
  text "THE INFORMATION CONTAINED IN THIS DRAWING IS PROPRIETARY AND" at 28.901,-124.942 h0.76
  text "RESTRICTED. ANY REPRODUCTION IN PART OR WHOLE WITHOUT THE" at 29.813,-126.442 h0.76
  text "EXPRESS WRITTEN PERMISSION OF THE OWNER IS PROHIBITED" at 30.529,-127.942 h0.76
DXF_JULY1:
  circle w0.013: c41.7,0 r1.325
  circle w0.013: c0,0 r1.325
  circle w0.013: c41.7,27 r1.325
  circle w0.013: c0,27 r1.325
  lines w0.013: -2.4,2.705 -2.4,24.295 1.03,24.295 1.03,2.705 ; 17.05,-3.15 -3.15,-3.15 -3.15,46.85 5.85,46.85 5.85,37.47 35.85,37.47 35.85,46.85 44.85,46.85 44.85,-3.15 38.35,-3.15 ; 17.05,-2.31 cw(c16.9,-2.05) 16.6,-2.05 16.6,-1.35 cw(c16.9,-1.35) 17.05,-1.09 ; 24.65,-3.15 32.35,-3.15 ; 24.65,-2.31 ccw(c24.8,-2.05) 25.1,-2.05 25.1,-1.35 ccw(c24.8,-1.35) 24.65,-1.09 ; 32.35,-3.15 38.35,-3.15 ; 32.35,-3.15 32.35,2.85 38.35,2.85 38.35,-3.15 ; -1.15,30.875 -1.15,34.475 3.65,34.475 3.65,30.875 -1.15,30.875 ; -1.15,39.75 -1.15,46.1 2.28,46.1 2.28,39.75 -1.15,39.75 ; -0.05,31.875 -0.05,33.475 2.55,33.475 2.55,31.875 -0.05,31.875 ; 4.85,-2.15 12.47,-2.15 12.47,0.39 4.85,0.39 4.85,-2.15 ; 11.99,29.85 11.99,33.02 29.71,33.02 29.71,29.85 11.99,29.85 ; 17.05,-3.85 17.05,1.45 24.65,1.45 24.65,-3.85 17.05,-3.85 ; 27,16.375 27,18.975 28.6,18.975 28.6,16.375 27,16.375 ; 38.05,30.875 38.05,34.475 42.85,34.475 42.85,30.875 38.05,30.875 ; 39.15,31.875 39.15,33.475 41.75,33.475 41.75,31.875 39.15,31.875 ; 39.25,18.675 39.25,23.475 42.85,23.475 42.85,18.675 39.25,18.675 ; 39.42,39.75 39.42,46.1 42.85,46.1 42.85,39.75 39.42,39.75
  text "2" at 241.413,282.926 h2.38
  text "1" at 292.883,282.77 h2.38
  text "COMPONENT LOCATIONS" at -5.907,58.89 h3.17
DXF_JULY6:
  drawing of 274 lines, arcs and shapes, not listed
  text "BOARD OUTLINE" at -31.043,214.551 h3.17
  text "COMPONENT LOCATIONS" at 216.259,211.85 h3.17
  text "KEEP OUTS" at 89.839,60.16 h3.17
DXF_JULY12:
  circle w0.013: c41.7,0 r1.075
  circle w0.013: c0,37.113 r0.6
  circle w0.013: c41.7,27 r1.075
  circle w0.013: c41.7,4 r0.6
  circle w0.013: c0,27 r1.075
  circle w0.013: c0,0 r1.075
  circle w0.013: c0,37.113 r0.6
  circle w0.013: c41.7,4 r0.6
  circle w0.013: c41.7,27 r2.25
  circle w0.013: c41.7,27 r1.075
  circle w0.013: c41.7,0 r2.25
  circle w0.013: c41.7,0 r1.075
  circle w0.013: c0,0 r2.25
  circle w0.013: c0,0 r1.075
  circle w0.013: c0,27 r2.25
  circle w0.013: c0,27 r1.075
  circle w0.013: c41.7,27 r1.075
  circle w0.013: c0,37.113 r0.6
  circle w0.013: c41.7,4 r0.6
  circle w0.013: c0,27 r1.075
  circle w0.013: c0,0 r1.075
  circle w0.013: c41.7,0 r1.075
  lines w0.013: 17.05,-3.15 -3.15,-3.15 ; 17.05,-2.31 cw(c16.9,-2.05) 16.6,-2.05 ; 17.05,-1.09 ccw(c16.9,-1.35) 16.6,-1.35 ; 24.65,-3.15 32.35,-3.15 ; 24.65,-2.31 ccw(c24.8,-2.05) 25.1,-2.05 ; 24.65,-1.09 cw(c24.8,-1.35) 25.1,-1.35 ; -3.15,-3.15 -3.15,46.85 ; -3.15,-3.15 -3.15,46.85 ; -3.15,-3.15 17.525,-3.15 18.025,-2.65 18.025,-1.55 cw(c18.475,-1.55) 18.925,-1.55 18.925,-2.65 19.425,-3.15 22.275,-3.15 22.775,-2.65 22.775,-1.55 cw(c23.225,-1.55) 23.675,-1.55 23.675,-2.65 24.175,-3.15 44.85,-3.15 ; -3.15,46.85 5.85,46.85 ; -3.15,46.85 5.85,46.85 ; 5.85,37.47 5.85,46.85 ; 5.85,37.47 35.85,37.47 ; 5.85,37.47 6.6,37.47 ; 5.85,37.47 5.85,46.85 ; 6.6,37.47 35.1,37.47 ; 6.6,37.47 6.6,28.6 35.1,28.6 35.1,37.47 ; 11.99,29.85 29.71,29.85 ; 11.99,29.85 11.99,33.02 ; 11.99,29.85 29.71,29.85 ; 11.99,29.85 11.99,33.02 ; 11.99,33.02 29.71,33.02 ; 11.99,33.02 29.71,33.02 ; 16.6,-2.05 ccw(c16.9,-2.05) 17.2,-2.05 ; 16.6,-2.05 ccw(c16.9,-2.05) 17.2,-2.05 ; 16.6,-2.05 16.6,-1.35 ; 16.6,-2.05 16.6,-1.35 ; 16.6,-2.05 16.6,-1.35 ; 16.6,-1.35 cw(c16.9,-1.35) 17.2,-1.35 ; 16.6,-1.35 cw(c16.9,-1.35) 17.2,-1.35 ; 17.2,-2.05 17.2,-1.35 ; 17.2,-2.05 17.2,-1.35 ; 24.5,-2.05 ccw(c24.8,-2.05) 25.1,-2.05 ; 24.5,-2.05 ccw(c24.8,-2.05) 25.1,-2.05 ; 24.5,-2.05 24.5,-1.35 ; 24.5,-2.05 24.5,-1.35 ; 24.5,-1.35 cw(c24.8,-1.35) 25.1,-1.35 ; 24.5,-1.35 cw(c24.8,-1.35) 25.1,-1.35 ; 25.1,-2.05 25.1,-1.35 ; 25.1,-2.05 25.1,-1.35 ; 25.1,-2.05 25.1,-1.35 ; 29.71,29.85 29.71,33.02 ; 29.71,29.85 29.71,33.02 ; 32.35,-3.15 32.35,2.85 38.35,2.85 38.35,-3.15 ; 32.35,-3.15 38.35,-3.15 ; 35.1,37.47 35.85,37.47 ; 35.85,37.47 35.85,46.85 ; 35.85,37.47 35.85,46.85 ; 35.85,46.85 44.85,46.85 ; 35.85,46.85 44.85,46.85 ; 38.35,-3.15 44.85,-3.15 ; 44.85,-3.15 44.85,46.85 ; 44.85,-3.15 44.85,46.85 ; -2.4,2.705 1.03,2.705 1.03,24.295 -2.4,24.295 -2.4,2.705 ; -1.52,3.585 -1.52,23.415 0.15,23.415 0.15,3.585 -1.52,3.585 ; -1.15,30.875 3.65,30.875 3.65,34.475 -1.15,34.475 -1.15,30.875 ; -1.15,39.75 -1.15,46.1 2.28,46.1 2.28,39.75 -1.15,39.75 ; -0.05,31.875 2.55,31.875 2.55,33.475 -0.05,33.475 -0.05,31.875 ; 4.85,-2.15 4.85,0.39 12.47,0.39 12.47,-2.15 4.85,-2.15 ; 17.05,-3.85 17.05,1.45 24.65,1.45 24.65,-3.85 17.05,-3.85 ; 38.05,30.875 38.05,34.475 42.85,34.475 42.85,30.875 38.05,30.875 ; 39.15,31.875 41.75,31.875 41.75,33.475 39.15,33.475 39.15,31.875 ; 39.25,18.675 39.25,23.475 42.85,23.475 42.85,18.675 39.25,18.675 ; 39.42,39.75 39.42,46.1 42.85,46.1 42.85,39.75 39.42,39.75 ; 40.25,19.775 41.85,19.775 41.85,22.375 40.25,22.375 40.25,19.775
  text "BOARD OUTLINE" at -31.043,214.551 h3.17
  text "COMPONENT LOCATIONS" at 216.259,211.85 h3.17
  text "KEEP OUTS" at 89.839,60.16 h3.17
DXF_CORE_MODULE:
  drawing of 744 lines, arcs and shapes, not listed
DXF_JULY18:
  drawing of 234 lines, arcs and shapes, not listed
  text "KEEP OUTS" at 86.495,215.06 h3.17
  text "BOARD OUTLINE" at -48.386,214.551 h3.17
  text "COMPONENT LOCATIONS" at 198.915,211.85 h3.17
Drill Drawing:
  circle w0.254: c-88.799,103.077 r0.847
  lines w0.254: -89.646,111.544 -87.952,111.544 -88.799,109.851 -89.646,111.544 ; -89.646,125.091 -89.646,125.514 -89.222,125.937 -89.646,126.361 -89.646,126.784 -89.222,126.784 -88.799,126.361 -88.376,126.784 -87.952,126.784 -87.952,126.361 -88.376,125.937 -87.952,125.514 -87.952,125.091 -88.376,125.091 -88.799,125.514 -89.222,125.091 -89.646,125.091 ; -89.646,132.711 -87.952,132.711 -87.952,134.404 -89.646,134.404 -89.646,132.711 ; -89.307,125.429 -89.307,125.683 -89.053,125.937 -89.307,126.191 -89.307,126.445 -89.053,126.445 -88.799,126.191 -88.545,126.445 -88.291,126.445 -88.291,126.191 -88.545,125.937 -88.291,125.683 -88.291,125.429 -88.545,125.429 -88.799,125.683 -89.053,125.429 -89.307,125.429
  lines w0.381: -91.164,101.088 125.184,101.088 ; -91.164,135.378 125.184,135.378 ; -77.172,97.278 -77.172,139.188 ; -59.448,97.278 -59.448,139.188 ; -25.269,97.278 -25.269,139.188 ; 1.901,97.278 1.901,139.188 ; 14.75,97.278 14.75,139.188 ; 33.389,97.278 33.389,139.188 ; 71.477,97.278 71.477,139.188 ; 86.459,97.278 86.459,139.188 ; 105.403,97.278 105.403,139.188 ; -91.164,97.278 125.184,97.278 125.184,139.188 -91.164,139.188 -91.164,97.278
  text "Symbol" at -88.878,136.521 h1.83
  text "Hit Count" at -76.029,136.521 h1.83
  text "Finished Hole Size" at -58.305,136.521 h1.83
  text "Hole Length" at -24.126,136.521 h1.83
  text "Plated" at 3.044,136.521 h1.83
  text "Hole Type" at 15.893,136.521 h1.83
  text "Drill Layer Pair" at 34.532,136.521 h1.83
  text "Via/Pad" at 72.62,136.521 h1.83
  text "Pad Shape" at 87.602,136.521 h1.83
  text "Tolerance" at 106.546,136.521 h1.83
  text "5" at -76.029,132.711 h1.52
  text "0.200mm (7.87mil)" at -58.305,132.711 h1.52
  text "-" at -24.126,132.711 h1.52
  text "PTH" at 3.044,132.711 h1.52
  text "Round" at 15.893,132.711 h1.52
  text "Top Layer - Bottom Layer" at 34.532,132.711 h1.52
  text "Via" at 72.62,132.711 h1.52
  text "Rounded" at 87.602,132.711 h1.52
  text "341" at -76.029,128.901 h1.52
  text "0.250mm (9.84mil)" at -58.305,128.901 h1.52
  text "-" at -24.126,128.901 h1.52
  text "PTH" at 3.044,128.901 h1.52
  text "Round" at 15.893,128.901 h1.52
  text "Top Layer - Bottom Layer" at 34.532,128.901 h1.52
  text "Via" at 72.62,128.901 h1.52
  text "Rounded" at 87.602,128.901 h1.52
  text "E" at -89.617,128.647 h1.69
  text "2" at -76.029,125.091 h1.52
  text "0.600mm (23.62mil)" at -58.305,125.091 h1.52
  text "1.300mm (51.18mil)" at -24.126,125.091 h1.52
  text "PTH" at 3.044,125.091 h1.52
  text "Slot" at 15.893,125.091 h1.52
  text "Top Layer - Bottom Layer" at 34.532,125.091 h1.52
  text "Pad" at 72.62,125.091 h1.52
  text "Rounded" at 87.602,125.091 h1.52
  text "8" at -76.029,121.281 h1.52
  text "0.800mm (31.50mil)" at -58.305,121.281 h1.52
  text "-" at -24.126,121.281 h1.52
  text "PTH" at 3.044,121.281 h1.52
  text "Round" at 15.893,121.281 h1.52
  text "Top Layer - Bottom Layer" at 34.532,121.281 h1.52
  text "Pad" at 72.62,121.281 h1.52
  text "Rounded" at 87.602,121.281 h1.52
  text "K" at -89.617,121.027 h1.69
  text "2" at -76.029,117.471 h1.52
  text "1.000mm (39.37mil)" at -58.305,117.471 h1.52
  text "-" at -24.126,117.471 h1.52
  text "PTH" at 3.044,117.471 h1.52
  text "Round" at 15.893,117.471 h1.52
  text "Top Layer - Bottom Layer" at 34.532,117.471 h1.52
  text "Pad" at 72.62,117.471 h1.52
  text "Rounded" at 87.602,117.471 h1.52
  text "P" at -89.617,117.217 h1.69
  text "1" at -76.029,113.661 h1.52
  text "1.000mm (39.37mil)" at -58.305,113.661 h1.52
  text "-" at -24.126,113.661 h1.52
  text "PTH" at 3.044,113.661 h1.52
  text "Round" at 15.893,113.661 h1.52
  text "Top Layer - Bottom Layer" at 34.532,113.661 h1.52
  text "Pad" at 72.62,113.661 h1.52
  text "Rectangle" at 87.602,113.661 h1.52
  text "O" at -89.617,113.407 h1.69
  text "2" at -76.029,109.851 h1.52
  text "1.200mm (47.24mil)" at -58.305,109.851 h1.52
  text "-" at -24.126,109.851 h1.52
  text "NPTH" at 3.044,109.851 h1.52
  text "Round" at 15.893,109.851 h1.52
  text "Top Layer - Bottom Layer" at 34.532,109.851 h1.52
  text "Pad" at 72.62,109.851 h1.52
  text "Rounded" at 87.602,109.851 h1.52
  text "4" at -76.029,106.041 h1.52
  text "2.150mm (84.65mil)" at -58.305,106.041 h1.52
  text "-" at -24.126,106.041 h1.52
  text "PTH" at 3.044,106.041 h1.52
  text "Round" at 15.893,106.041 h1.52
  text "Top Layer - Bottom Layer" at 34.532,106.041 h1.52
  text "Pad" at 72.62,106.041 h1.52
  text "Rounded" at 87.602,106.041 h1.52
  text "M" at -89.617,105.787 h1.69
  text "2" at -76.029,102.231 h1.52
  text "2.500mm (98.43mil)" at -58.305,102.231 h1.52
  text "-" at -24.126,102.231 h1.52
  text "PTH" at 3.044,102.231 h1.52
  text "Round" at 15.893,102.231 h1.52
  text "Top Layer - Bottom Layer" at 34.532,102.231 h1.52
  text "Pad" at 72.62,102.231 h1.52
  text "Rounded" at 87.602,102.231 h1.52
  text "367 Total" at -76.029,98.421 h1.52
  text "Slot definitions :" at -88.878,94.738 h1.52
  text "Routed Path Length" at -62.648,94.738 h1.52
  text "= Calculated from tool start centre position to tool end centre position." at -34.64,94.738 h1.52
  text "Hole Length" at -62.648,92.199 h1.52
  text "= Routed Path Length + Tool Size = Slot length as defined in the PCB layout" at -45.051,92.199 h1.52
  text ".Layer_Name" at -26.723,-126.288 h3.5
Mechanical 28:
  text "1:1 SCALE" at 0.391,319.995 h6.35
DXF_20151204_Bot:
  circle w0.013: c32.49,0.015 r0.45
  circle w0.013: c34.99,0.015 r0.45
  circle w0.013: c37.49,0.015 r0.45
  circle w0.013: c39.693,66.547 r0.51
  circle w0.013: c42.233,66.547 r0.51
  circle w0.013: c47.313,66.547 r0.51
  circle w0.013: c32.49,0.015 r0.45
  circle w0.013: c34.99,0.015 r0.45
  circle w0.013: c37.49,0.015 r0.45
  circle w0.013: c39.693,66.547 r0.51
  circle w0.013: c42.233,66.547 r0.51
  circle w0.013: c47.313,66.547 r0.51
  circle w0.013: c37.49,0.015 r1
  circle w0.013: c37.49,0.015 r0.45
  circle w0.013: c37.49,0.015 r1
  circle w0.013: c32.49,0.015 r1
  circle w0.013: c32.49,0.015 r0.45
  circle w0.013: c32.49,0.015 r1
  circle w0.013: c34.99,0.015 r1
  circle w0.013: c34.99,0.015 r0.45
  circle w0.013: c34.99,0.015 r1
  circle w0.013: c34.99,0.015 r1
  circle w0.013: c34.99,0.015 r0.45
  circle w0.013: c34.99,0.015 r1
  circle w0.013: c42.233,66.547 r1.01
  circle w0.013: c42.233,66.547 r0.51
  circle w0.013: c42.233,66.547 r1.01
  circle w0.013: c39.693,66.547 r1.01
  circle w0.013: c39.693,66.547 r0.51
  circle w0.013: c39.693,66.547 r1.01
  circle w0.013: c32.49,0.015 r1
  circle w0.013: c32.49,0.015 r0.45
  circle w0.013: c32.49,0.015 r1
  circle w0.013: c37.49,0.015 r1
  circle w0.013: c37.49,0.015 r0.45
  circle w0.013: c37.49,0.015 r1
  circle w0.013: c47.313,66.547 r1.01
  circle w0.013: c47.313,66.547 r0.51
  circle w0.013: c47.313,66.547 r1.01
  lines w0.013: 18.19,-3.96 18.19,-2.08 19.04,-2.08 19.04,-3.96 22.94,-3.96 22.94,-2.08 23.79,-2.08 23.79,-3.96

## Dimensions
43.85,45.85 to 48.674,48.311 on FAB_DWG
44.85,45.85 to -3.15,45.85 on FAB_DWG
-2.15,46.85 to -3.15,-3.15 on FAB_DWG

## Text inside footprints (layer, text, board x,y; h text height)
C60: Mechanical 18 "1" at 22.58,14.135 h0.79; Mechanical 18 "2" at 23.317,12.035 h0.79
D1: TOP_COURTYARD "G" at 1.45,36.072 h0.64; TOP_COURTYARD "D" at 2.45,35.872 h0.64; TOP_COURTYARD "S" at 3.35,36.072 h0.64
D4: DXF_20151204_top "A" at 33.948,4.82 h0.64 r180; DXF_20151204_top "C" at 35.92,4.812 h0.64 r180
D7: DXF_20151204_top "A" at 25.495,4.152 h0.64 r90; DXF_20151204_top "C" at 25.487,2.18 h0.64 r90
J1: TOP_COURTYARD "Board Edge" at 38.2,-3.425 h0.6 r180
J2: Top Overlay "1" at -2.214,24.519 h0.76 r270
J3: Top Overlay "3" at 4.6,0.9 h0.6; Top Overlay "1" at 12.7,2.4 h0.6 r180; Mechanical 30 "1" at 6.287,1.9 h0.64; Mechanical 30 "2" at 8.827,1.9 h0.64; Mechanical 30 "3" at 11.367,1.9 h0.64
J4: Mechanical 18 "1" at -0.526,39.871 h0.64 r90; Top Overlay "1" at -1.625,45.5 h0.7
J8: 3D_TOP "1" at 13.198,28.941 h1.02 r180; 3D_TOP "2" at 13.325,35.275 h1.02 r180; 3D_TOP "80" at 29.456,35.156 h1.02 r180; 3D_TOP "79" at 29.464,28.86 h1.02 r180; Top Overlay "79" at 30.54,29.878 h0.7; Top Overlay "80" at 30.54,32.628 h0.7; Top Overlay "2" at 10.79,32.378 h0.7; Top Overlay "1" at 11.04,29.878 h0.7
J11: Mechanical 18 "1" at 42.376,44.629 h0.64 r270; Top Overlay "1" at 43.3,38.325 h0.7
J19: TOP_COURTYARD "Board Edge" at 24.325,-3.29 h0.7 r180
M1: Mechanical 18 "1" at 43.478,27 h0.64 r180
M2: Mechanical 18 "1" at 1.778,27 h0.64 r180
M3: Mechanical 18 "1" at 1.778,0 h0.64 r180
M4: Mechanical 18 "1" at 43.478,0 h0.64 r180
Q1: TOP_COURTYARD "D" at 26.025,14.1 h0.3 r90; TOP_COURTYARD "S" at 26.225,13.425 h0.3 r90; TOP_COURTYARD "G" at 25.875,13.425 h0.3 r90
Q2: TOP_COURTYARD "G" at 33.122,27.55 h0.64 r270; TOP_COURTYARD "D" at 32.922,26.55 h0.64 r270; TOP_COURTYARD "S" at 33.122,25.65 h0.64 r270
U21: Mechanical 18 "4" at 7.35,26.163 h0.64 r270; Mechanical 18 "2" at 8.346,26.117 h0.64 r270; Mechanical 18 "3" at 7.846,26.117 h0.64 r270